# Altium PCB MCORD_AFE_SEC.PCBDOC
Units mil, origin at the board's own origin, x right, y up, seen from the top; angles counter-clockwise.
Board outline 2322.83 x 787.4 mil, 4 copper layers (TOP, G1, PWR, BOT), stack 58.685 mil thick; 42 components, 24 nets, 110 pads, 44 vias.
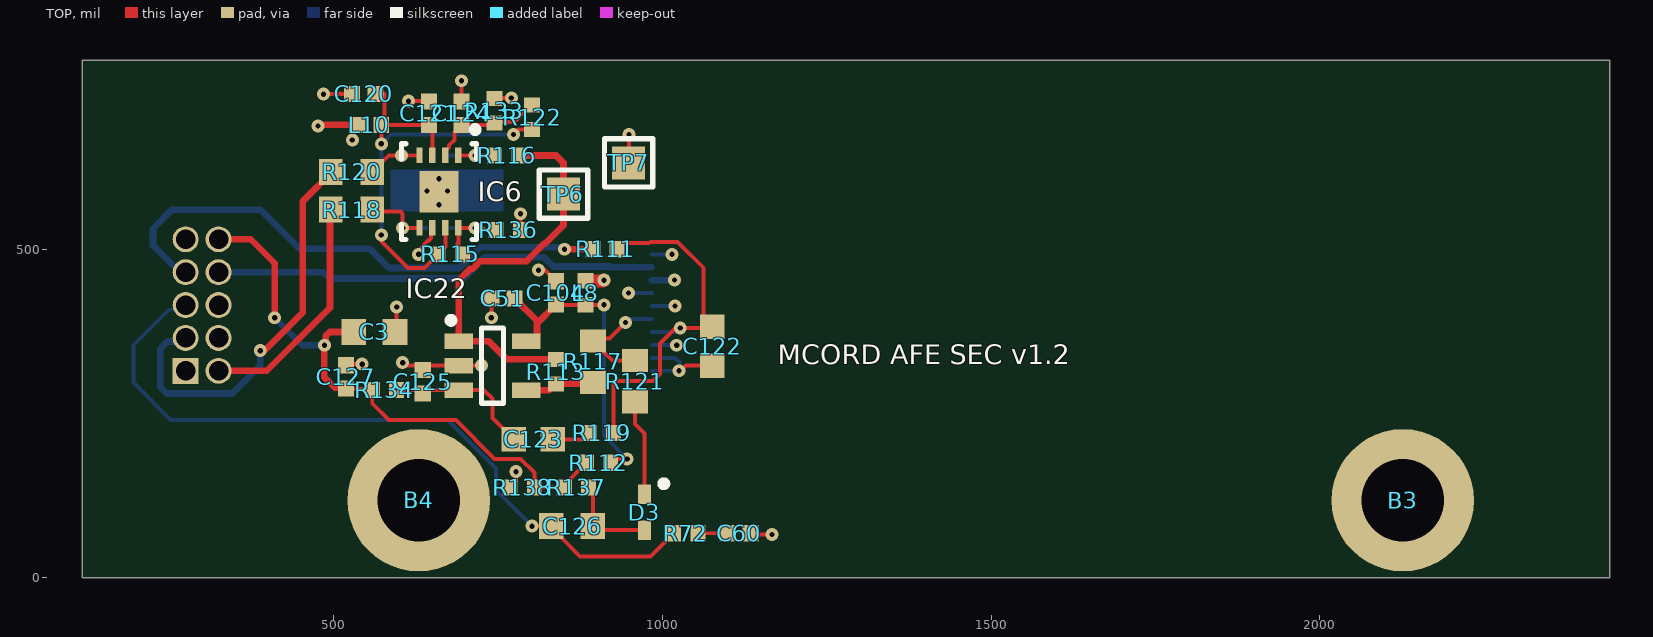
[diagram p0: TOP view]
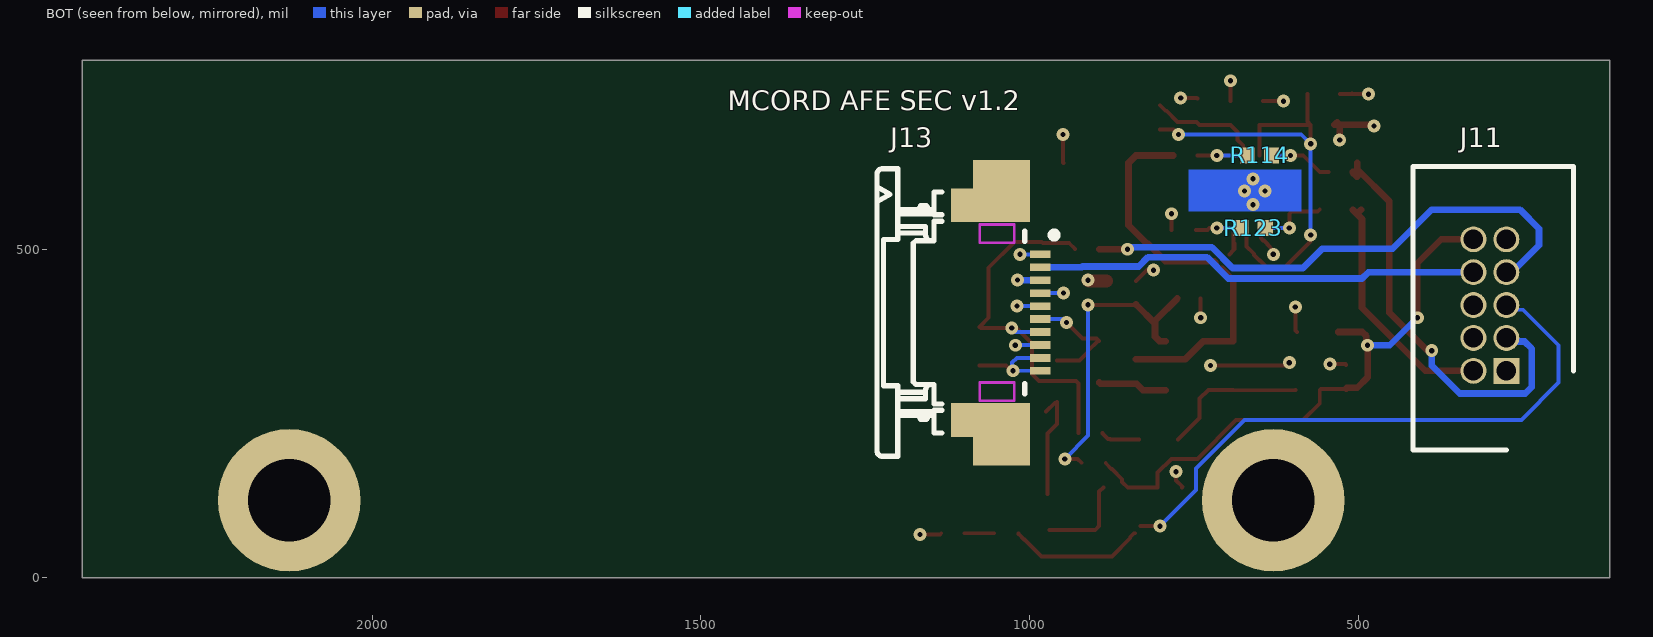
[diagram p1: BOT view, seen from below]
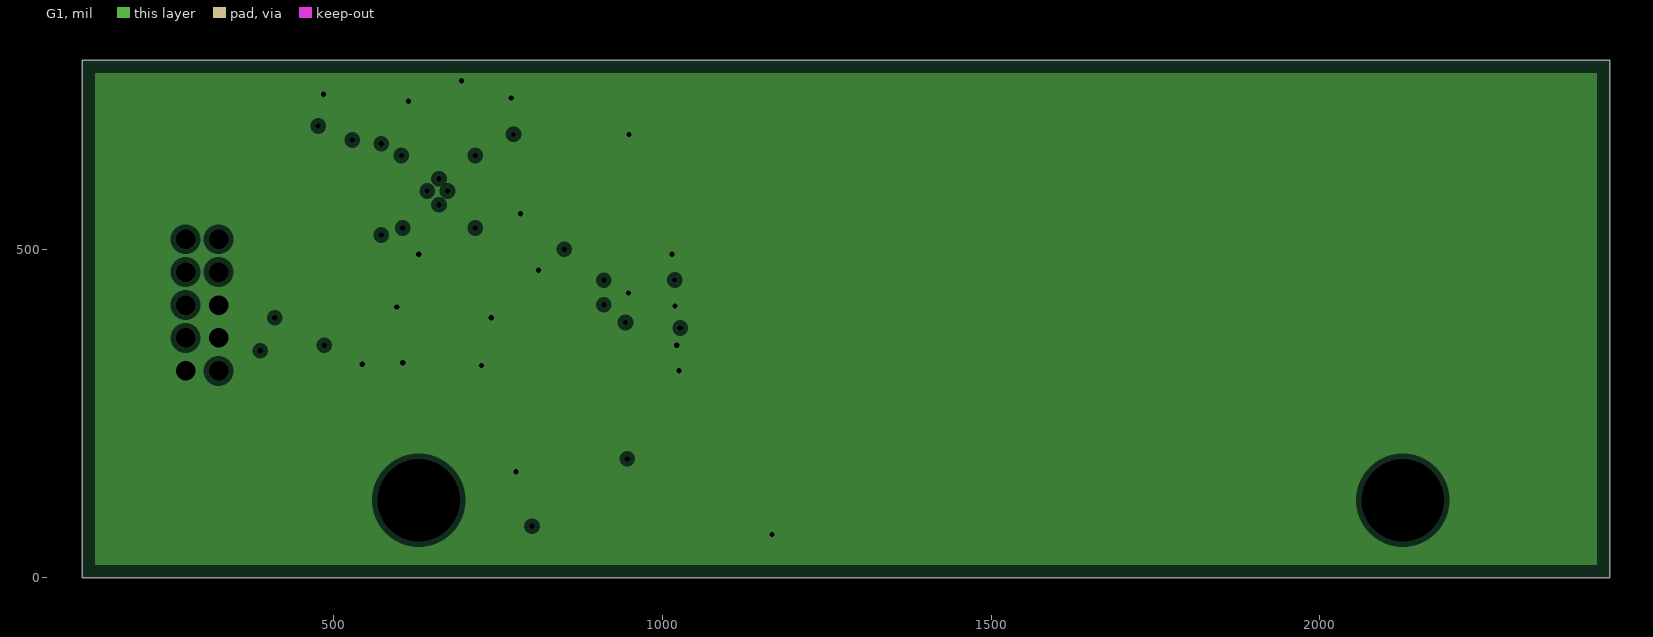
[diagram p2: G1, clearances drawn from the general rule]
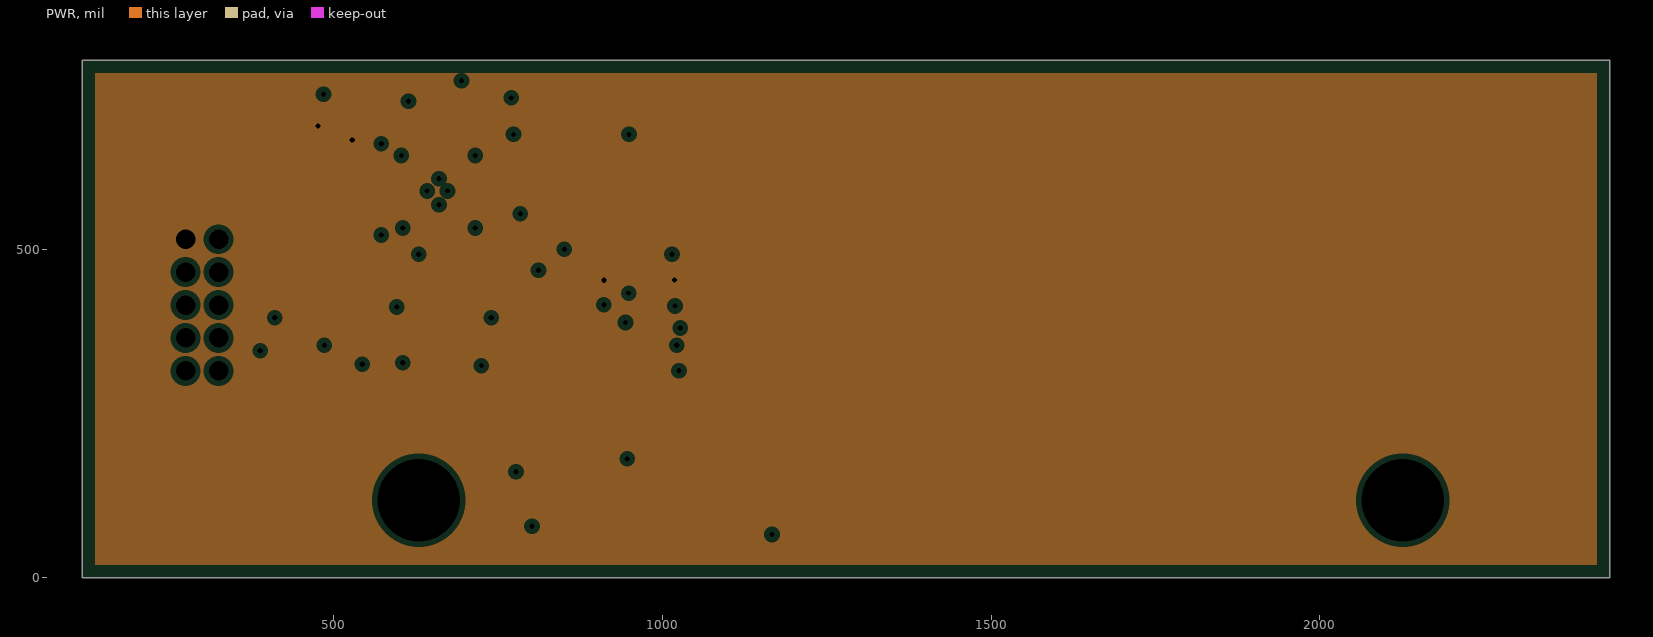
[diagram p3: PWR, clearances drawn from the general rule]
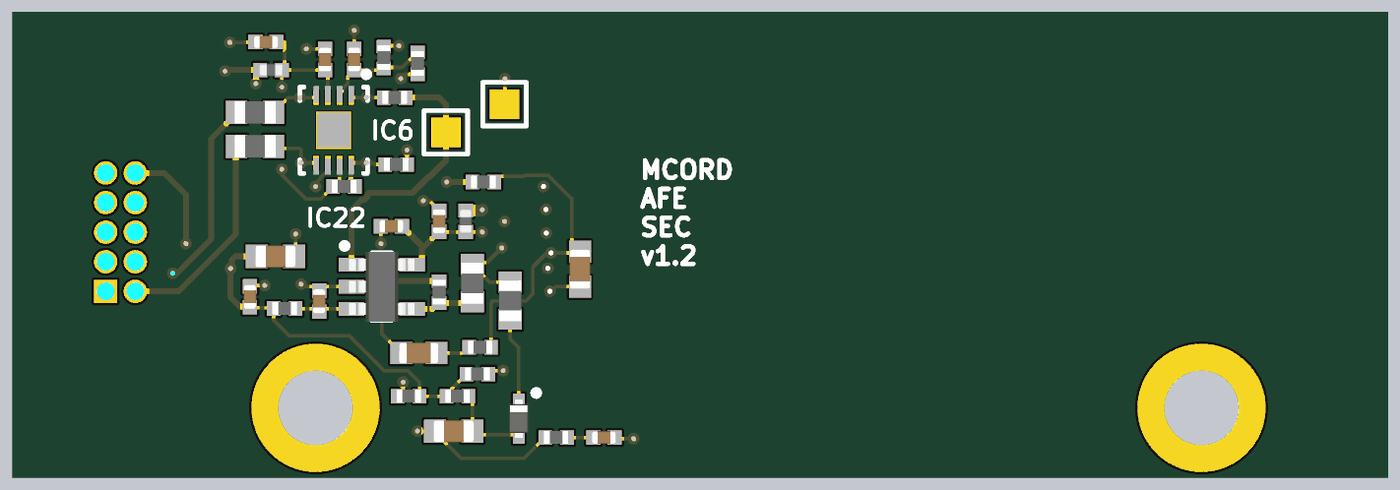
[diagram p4: 3D render of the assembled board from above, using the file's embedded part models]
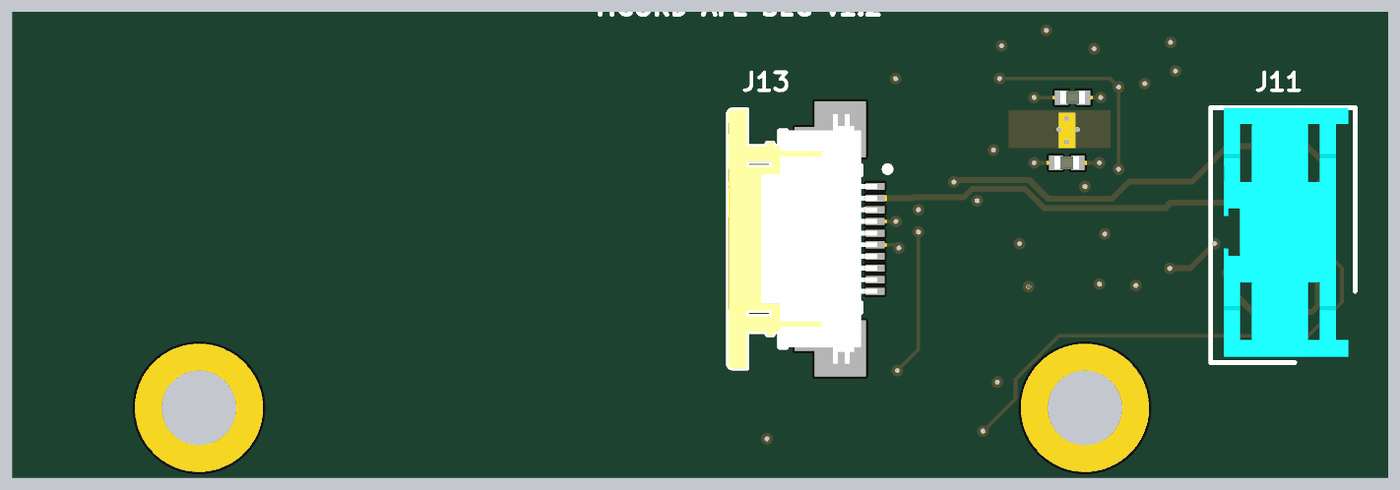
[diagram p5: 3D render of the assembled board from below, using the file's embedded part models]

## Layer stack, top to bottom
TopSolder: solder mask 0.3937, Solder Resist, Dk 3.5
TOP: signal copper 1.3778
Dielectric1: prepreg 7.0866, FR-4, Dk 4.8
G1: plane copper 1.3779, net GND
Dielectric2: core 39, Core-042, Dk 4.6
PWR: plane copper 1.3779, net P5V0
Dielectric3: prepreg 7.0866, FR-4, Dk 4.8
BOT: signal copper 1.3778
BottomSolder: solder mask 0.3937, Solder Resist, Dk 3.5

## Board outline
118.11,0 2440.94,0 2440.94,787.4 118.11,787.4

## Design rules (kind name [scope] priority, off if disabled: settings)
AcuteAngle [All] p1: minimum=6.00000000000000E+0001 checktracksonly=FALSE
Clearance keepout [All vs OnLayer('KeepOutLayer')] p1: gap=3.94 ignorepadtopadclearanceinfootprint=FALSE
Clearance [All] p2: gap=5 ignorepadtopadclearanceinfootprint=FALSE
DiffPairsRouting [All] p1: maxlimit=20 minlimit=15 mostfreqgap=17 toplayer_minwidth=15 toplayer_maxwidth=15 toplayer_prefwidth=15 bottomlayer_minwidth=15 bottomlayer_maxwidth=15 bottomlayer_prefwidth=15 maxuncoupledlength=500
HoleSize [All] p1: absolutevalues=TRUE maxlimit=200 minlimit=1 maxpercent=80.000 minpercent=20.000
HoleToHoleClearance [All] p1: gap=5 allowstackedmicrovias=TRUE
MinimumSolderMaskSliver [All] p1: minsoldermaskwidth=0
MinimumSolderMaskSliver SilkscreenOverComponentPads [All] p2: minsoldermaskwidth=0
PlaneClearance [All] p1: clearance=8
PlaneConnect [All] p1: pad.planeconnectstyle=Relief pad.reliefexpansion=5 pad.reliefentries=4 pad.reliefconductorwidth=5 pad.reliefairgap=5 via.planeconnectstyle=Direct via.reliefexpansion=20 via.reliefentries=4 via.reliefconductorwidth=10 via.reliefairgap=10
PolygonConnect [All] p1: thpad.connectstyle=Relief thpad.reliefconductorwidth=5 thpad.reliefentries=4 thpad.polygonreliefangle="90 Angle" thpad.airgapwidth=5 smdpad.connectstyle=Relief smdpad.reliefconductorwidth=5 smdpad.reliefentries=4 smdpad.polygonreliefangle="90 Angle" smdpad.airgapwidth=5 via.connectstyle=Direct via.reliefconductorwidth=10 via.reliefentries=4 via.polygonreliefangle="90 Angle" via.airgapwidth=10
RoomDefinition MCORD_AFE_SEC [InComponentClass('MCORD_AFE_SEC')] p1 off: confinementstyle=ConfineIn formatcopy=TRUE lockcomponents=FALSE outline 2359.49,787.4 2359.49,188.82 2125.98,188.82 2125.98,787.4
RoutingVias [All] p1: holewidth=7.87 width=19.68 viastyle="Through Hole" minholewidth=7.87 minwidth=19.68 maxholewidth=19.68 maxwidth=39.37
SilkToSilkClearance [All] p1: silktosilkclearance=0
SilkToSolderMaskClearance [IsPad] p1: minsilkscreentomaskgap=0 clearancetoexposedcopper=TRUE
SolderMaskExpansion [All] p1: expansion=4 istentingtop=FALSE
ViasUnderSMD ViasUnderSMD_allow [InComponent('IC18') or InComponent('IC10') or InComponent('IC13') or InComponent('IC14') or InComponent('IC15')] p1: allowed=TRUE
ViasUnderSMD [All] p2: allowed=FALSE
Width Width_1 [(InDifferentialPairClass('All Differential Pairs'))] p1: maxlimit=8 minlimit=8 preferedwidth=8
Width [All] p2: maxlimit=100 minlimit=6 preferedwidth=6
22 further rules are at their usual default settings.

## Components (designator, comment, footprint, x,y, rotation, side; value= is the part's Value field where it differs from the comment)
B3 "Plated Hole" MTG320_550 2125.98,118.11 r0 top locked
B4 "Plated Hole" MTG320_550 629.92,118.11 r0 top locked
C3 "1uF" CAPC1608X87N 562.44,374.04 r180 top
C51 "1nF" CAPC1005X55N 758,425 r0 top
C60 "1nF" CAPC1005X55N 1117,68 r180 top
C104 "100nF" CAPC1005X55N 838.58,433.46 r270 top
C120 "1nF" CAPC1005X55N 546.3,736.07 r0 top
C121 "100nF" CAPC1005X55N 645.87,706.73 r270 top
C122 "100nF" CAPC1608X90N 1076.38,352.36 r90 top
C123 "100nF" CAPC1608X90N 804.13,210.63 r0 top
C124 "100nF" CAPC1005X55N 695.08,706.73 r270 top
C125 "22pF" CAPC1005X55N 636.03,298.23 r270 top
C126 "10pF" CAPC1608X87N 863.19,78.74 r0 top
C127 "100nF" CAPC1005X55N 519.11,305.7 r270 top
D3 "1PS79SB70" SODFL1608X65N 973,100 r270 top
IC6 "LMH6552SD" SDA08C 660.63,587.25 r270 top
IC22 "AD8009JRTZ-REEL7" SOT95P280X145-5N 741.93,322.83 r0 top
J11 "CON_IDC10_1.27_45210-600230" SHDR10W38P127_2X5_1069X594X747P 275.59,314.96 r90 bottom
J13 "FFC/FPC" MOLEX_52745-1097 984.25,403.55 r270 bottom
L8 "120R@100MHz" INDC1005X55N 883.46,433.46 r90 top
L10 "120R@100MHz" INDC1005X55N 554.94,689.02 r180 top
R72 "49R9" RESC1005X40N 1036.04,68 r180 top
R111 "10k" RESC1005X40N 913.19,499.75 r180 top
R112 "Undefined" RESC1005X40N 903.15,175.2 r0 top
R113 "5k1" RESC1005X40N 838.58,313.78 r90 top
R114 "270" RESC1005X40N 650.79,642.37 r180 bottom
R115 "240" RESC1005X40N 677.95,492.13 r180 top
R116 "120" RESC1005X40N 763.58,642.37 r180 top
R117 "22" RESC1608X55N 894.69,328.74 r270 top
R118 "22" RESC1608X55N 527.8,560.04 r180 top
R119 "270" RESC1005X40N 907.87,220.47 r180 top
R120 "22" RESC1608X55N 527.8,617.33 r180 top
R121 "22" RESC1608X55N 958.66,299.21 r90 top
R122 "510" RESC1005X40N 802.17,700.24 r270 top
R123 "270" RESC1005X40N 660.63,532.13 r180 bottom
R133 "510" RESC1005X40N 745.08,710.28 r270 top
R134 "1k" RESC1005X40N 577.8,286.01 r180 top
R136 "240" RESC1005X40N 765.95,529.25 r180 top
R137 "47k" RESC1005X40N 869.69,137.8 r180 top
R138 "Undefined" RESC1005X40N 787.4,137.8 r0 top
TP6 "Test Point" TPS127 850,583.64 r0 top
TP7 "Test Point" TPS127 949.02,631.08 r0 top

## Footprints (in the part's own frame and the unit in brackets; to place one, negate y for a bottom-side part, rotate by r counter-clockwise, add the part's x,y. Pads: shape width x height; smd on the part's side, far side on the other; paste and mask are expansions set on the pad)
CAPC1005X55N [mm] "Capacitor, Non-Polarized, Chip; 1.00mm L X 0.50mm W X 0.70mm H, IPC Medium Density"
  rect 0.62x0.62 smd: 1(-0.45,0) 2(0.45,0)
  body extent -0.52,-0.27 0.53,0.28, height 0.55
CAPC1608X87N [mm] "Chip Capacitor, Body 1.6x0.8mm IPC Medium Density"
  rect 0.95x1 smd: 1(-0.8,0) 2(0.8,0)
  body extent -0.87,-0.47 0.88,0.48, height 0.87
CAPC1608X90N [mm] "Chip Capacitor, Body 1.6x0.8mm IPC Medium Density"
  rect 0.95x0.95 smd: 1(-0.75,0) 2(0.75,0)
  body extent -0.85,-0.45 0.85,0.45, height 0.9
INDC1005X55N [mm] "Chip Inductor, 2-Leads, EIA 0402, Metric 1005, Body 1x0.5mm, 0402IPC Medium Density"
  rect 0.6x0.62 smd: 1(-0.46,0) 2(0.46,0)
  body extent -0.52,-0.27 0.53,0.28, height 0.55
MOLEX_52745-1097 [mm] "10 Contacts, 0.5mm Pitch, Right Angled Surface Mount FPC Connector, ZIF, Top Contact Style"
  rect 0.3x0.8 smd: 1(-2.25,0) 2(-1.75,0) 3(-1.25,0) 4(-0.75,0) 5(-0.24,0) 6(0.25,0) 7(0.75,0) 8(1.25,0) 9(1.75,0) 10(2.25,0)
  rect 1.1x2.2 smd: MECH(-5.35,-1.5) MECH(5.35,-1.5)
  rect 1.3x3.05 smd: MECH(-4.15,-1.925) MECH(4.15,-1.925)
  TOP keep-out lines w0.1: 3.4,-1 3.4,-2.34 2.7,-2.34 2.7,-1 3.4,-1 ; -2.7,-1 -3.4,-1 -3.4,-2.34 -2.7,-2.34 -2.7,-1
  silkscreen extent -5.55,-6.3 5.55,0.66, body extent -5.55,-6.3 5.55,0.1, height 2
MTG320_550 [mm] "Plated Through Hole: Hole Dia.=3.2mm Pad Dia.=5.5mm"
  round 5.5 hole 3.2: 1(0,0)
RESC1005X40N [mm] "Chip Resistor, EIA 0402, Metric 1005, Body 1.0x0.5mm, IPC Medium Density"
  rect 0.58x0.62 smd: 1(-0.47,0) 2(0.47,0)
  body extent -0.52,-0.27 0.53,0.28, height 0.4
RESC1608X55N [mm] "Chip Resistor, EIA 0603, Metric 1608, Body 1.6x0.8mm, IPC Medium Density"
  rect 0.9x1 smd: 1(-0.8,0) 2(0.8,0)
  body extent -0.87,-0.47 0.88,0.48, height 0.55
SDA08C [mm] "SON, 8-Leads, Body 2.5x3mm, Pitch 0.5mm, NSC Recommended"
  rect 0.6x0.25 smd paste-0.125 mask+0.051: 1(-1.4,0.75) 2(-1.4,0.25) 3(-1.4,-0.25) 4(-1.4,-0.75) 5(1.4,-0.75) 6(1.4,-0.25) 7(1.4,0.25) 8(1.4,0.75)
  rect 1.6x1.5 smd paste-0.05 mask+0.051: 9(0,0)
  silkscreen extent -2.52,-1.45 1.85,1.53, body extent -1.55,-1.3 1.55,1.3, height 0.8
SHDR10W38P127_2X5_1069X594X747P [mm]
  rect 1x1 hole 0.75: 1(0,0)
  round 1 hole 0.75: 2(0,1.27) 3(1.27,0) 4(1.27,1.27) 5(2.54,0) 6(2.54,1.27) 7(3.81,0) 8(3.81,1.27) 9(5.08,0) 10(5.08,1.27)
  silkscreen extent -3.06,-2.59 7.88,3.61, body extent -2.79,-2.29 7.87,3.05, height 5.65
SODFL1608X65N [mm] "Ultra Small Outline Diode Flat Lead (SOD-523), Body; 1.2mm L X 0.8mm W X 0.65mm H, IPC Medium Density"
  rect 0.75x0.5 smd: 1(-0.7,0) 2(0.7,0)
  silkscreen extent -1.22,0.63 -0.98,0.88, body extent -0.82,-0.42 0.83,0.43, height 0.65
SOT95P280X145-5N [mm] "SOT, 0.95mm pitch; 5 pin, 1.60mm W X 2.90mm L X 1.45mm H body, IPC Medium Density"
  rect 1.1x0.6 smd: 1(-1.3,0.95) 2(-1.3,0) 3(-1.3,-0.95) 4(1.3,-0.95) 5(1.3,0.95)
  silkscreen extent -1.72,-1.45 0.43,1.87, body extent -1.4,-1.5 1.4,1.5, height 1.45
TPS127 [mil] "1.27 x  1.27mm SMD Test Point Area"
  rect 50x50 smd paste-50: 1(0,0)
  silkscreen extent -37,-37 37,37

## Part data
B3 B4: library part PLATED_HOLE3.2_PAD5.5, "Single Terminal Socket", Author="CERN DEM JMW", ComponentHeight=0mm, Component Type="Standard (No BOM)", CreateDate=01.10.2012, Family="Plated Hole", HelpURL=Undefined, LatestRevisionDate=01.10.2012, Mounted=No, PackageDescription="Plated Through Hole: Hole Dia.=3.2mm Pad Dia.=5.5mm", Part Description="Plated Through Hole: Hole Dia.=3.2mm Pad Dia.=5.5mm", Part Number=PLATED_HOLE3.2_PAD5.5, Pin Count=1, Sense=No, SMD=No, Socket=No, Status=None
C3: library part CC0603_1UF_16V_10%_X7R, "Non-polarised capacitor", Case=0603, Manufacturer=GENERIC, Manufacturer1 ComponentHeight=0.9mm, Manufacturer1 Example="YAGEO PHYCOMP", Manufacturer1 Part Number=223878615663, Manufacturer Part Number=CC0603_1uF_16V_10%_X7R, Tolerance=±10%, Voltage=16V, Author="CERN DEM JLC", Component Type=Standard, CreateDate=03.12.2007, HelpURL=\\cern.ch\dfs\Applications\Altium\Datasheets\CC0603_X7R_PHYCOMP.pdf, LatestRevisionDate=17.04.2015, Mounted=Yes, Part Description="SMD Multilayer Chip Ceramic Capacitor", Part Number=CC0603_1UF_16V_10%_X7R, Pin Count=2, Sense=No, SMD=Yes, Socket=No, Status=None, TC=X7R
C51 C60 C120: library part CC0402_1NF_50V_5%_C0G, "Non-polarised capacitor", Case=0402, Manufacturer=GENERIC, Manufacturer1 ComponentHeight=0.55mm, Manufacturer1 Example=KEMET, Manufacturer1 Part Number=C0402C102J5GACTU, Tolerance=±5%, Voltage=50V, Author="CERN DEM BC", Component Type=Standard, CreateDate=02/09/2019, HelpURL="\\cern.ch\dfs\Applications\Altium\Datasheets\CC0402_C0G_KEMET_(Commercial Grade).pdf", LatestRevisionDate=02/09/2019, Manufacturer Part Number=CC0402_1NF_50V_5%_C0G, Mounted=Yes, Part Description="SMD Multilayer Chip Ceramic Capacitor", Part Number=CC0402_1NF_50V_5%_C0G, Pin Count=2, Sense=No, SMD=Yes, Socket=No, Status=Preferred, TC=C0G/NP0
C104 C121 C124 C127: library part CC0402_100NF_16V_10%_X7R, "Non-polarised capacitor", Case=0402, Manufacturer=GENERIC, Manufacturer1 ComponentHeight=0.55mm, Manufacturer1 Example=MURATA, Manufacturer1 Part Number=GRM155R71C104KA88D, Tolerance=±10%, Voltage=16V, Author="CERN DEM JLC", Component Type=Standard, CreateDate=05.12.2013, HelpURL=\\cern.ch\dfs\Applications\Altium\Datasheets\CC0402_X7R_MURATA_GRM.pdf, LatestRevisionDate=03.12.2007, Manufacturer Part Number=CC0402_100NF_16V_10%_X7R, Mounted=Yes, Part Description="SMD Multilayer Chip Ceramic Capacitor", Part Number=CC0402_100NF_16V_10%_X7R, Pin Count=2, Sense=No, SMD=Yes, Socket=No, Status="Not Recommended", TC=X7R
C122 C123: library part CC0603_100NF_100V_10%_X7R, "Non-polarised capacitor", Case=0603, Manufacturer=GENERIC, Manufacturer1 ComponentHeight=0.9mm, Manufacturer1 Example=MURATA, Manufacturer1 Part Number=GRM188R72A104KA35D, Tolerance=±10%, Voltage=100V, Author="CERN DEM JLC", Component Type=Standard, CreateDate=11.12.2013, HelpURL=\\cern.ch\dfs\Applications\Altium\Datasheets\CC0603_MURATA_GRM188R72A104KA35D.pdf, LatestRevisionDate=11.12.2013, Manufacturer Part Number=CC0603_100NF_100V_10%_X7R, Mounted=Yes, Part Description="SMD Multilayer Chip Ceramic Capacitor", Part Number=CC0603_100NF_100V_10%_X7R, Pin Count=2, Sense=No, SMD=Yes, Socket=No, Status=None, TC=X7R
C125: library part CC0402_22PF_50V_5%_C0G, "Non-polarised capacitor", Case=0402, Manufacturer=GENERIC, Manufacturer1 ComponentHeight=0.55mm, Manufacturer1 Example=KEMET, Manufacturer1 Part Number=C0402C220J5GACTU, Tolerance=±5%, Voltage=50V, Author="CERN DEM JLC", Component Type=Standard, CreateDate=03.12.2007, HelpURL="\\cern.ch\dfs\Applications\Altium\Datasheets\CC0805_C0G_KEMET_(Commercial Grade).pdf", LatestRevisionDate=03.12.2007, Manufacturer Part Number=CC0402_22PF_50V_5%_C0G, Mounted=Yes, Part Description="SMD Multilayer Chip Ceramic Capacitor", Part Number=CC0402_22PF_50V_5%_C0G, Pin Count=2, Sense=No, SMD=Yes, Socket=No, Status=Preferred, TC=C0G/NP0
C126: library part CC0603_10PF_50V_5%_NP0, "Non-polarised capacitor", Case=0603, Manufacturer=GENERIC, Manufacturer1 ComponentHeight=0.87mm, Manufacturer1 Example=PHYCOMP, Manufacturer1 Part Number=223886715109, Tolerance=±5%, Voltage=50V, Author="CERN DEM JLC", Component Type=Standard, CreateDate=03.12.2007, HelpURL=\\cern.ch\dfs\Applications\Altium\Datasheets\CC0603_NP0_PHYCOMP.pdf, LatestRevisionDate=03.12.2007, Manufacturer Part Number=CC0603_10PF_50V_5%_NP0, Mounted=Yes, Part Description="SMD Multilayer Chip Ceramic Capacitor", Part Number=CC0603_10PF_50V_5%_NP0, Pin Count=2, Sense=No, SMD=Yes, Socket=No, Status=Preferred, TC=C0G/NP0
D3: "Diode", Case=SOD523, Manufacturer=NEXPERIA, Power=70mA, Voltage=70V, Author=GK, Bonding=No, Component Type=Standard, ComponentHeight=0.65mm, CreateDate=11/09/2018, Device=1PS79SB70, HelpURL=\\cern.ch\dfs\Applications\Altium\Datasheets\BAS516.pdf, LatestRevisionDate=11/09/2018, Manufacturer Part Number=1PS79SB70, Mounted=Yes, PackageDescription="Ultra Small Outline Diode Flat Lead (SOD-523), Body; 1.2mm L X 0.8mm W X 0.65mm H, IPC Medium Density", Part Description="High-speed switching diode", Part Number=1PS79SB70, Pin Count=2, PressFit=No, Sense=No, SMD=Yes, Socket=No
IC6: library part CMP-0055-00984-1, "1.5 GHz Fully Differential Amplifier, 8-pin LLP", Manufacturer="National Semiconductor", PackageTopMarking=XYTT*6552, PowerWise=Y, CompType=Amplifiers, DatasheetVersion=Sep-2007, PackageDescription="LLP, Plastic, Dual, 2.5 x 3.0 x 0.8mm Body, 8 Lead, 0.5mm Pitch, No Pullback", PackageReference=SDA08C, PackageVersion="revA, Jan-2004", PinCount=8, RoHS=Y
IC22: "Operational Amplifier", Case=SOT23-5, Manufacturer="ANALOG DEVICES", Author="CERN DEM JLC", Bonding=No, Component Type=Standard, ComponentHeight=1.45mm, CreateDate=23/09/2010, Device=AD8009JRTZ-REEL7, HelpURL=\\cern.ch\dfs\Applications\Altium\Datasheets\AD8009JRTZ-REEL7.pdf, LatestRevisionDate=23/09/2010, Manufacturer Part Number=AD8009JRTZ-REEL7, Mounted=Yes, PackageDescription="SOT, 0.95mm pitch; 5 pin, 1.60mm W X 2.90mm L X 1.45mm H body, IPC Medium Density", Part Description="1GHz, 5,500 V/us Low Distortion Amplifier", Part Number=AD8009JRTZ-REEL7, Pin Count=5, PressFit=No, Sense=No, SMD=Yes, Socket=No
J11: "Connector", Manufacturer_Name=3M, Manufacturer_Part_Number=45210-600230, Mouser Part Number=517-45210-600230, RS Part Number=8273691, Allied_Number=70331440, Allied Price/Stock=https://www.alliedelec.com/3m-45210-600230/70331440/, Datasheet Link=http://multimedia.3m.com/mws/media/905148O/3m-shrouded-boardmount-header-452-series-cd2437.pdf, Height=7.468mm, Mouser Price/Stock=https://www.mouser.com/Search/Refine.aspx?Keyword=517-45210-600230, RS Price/Stock=https://uk.rs-online.com/web/p/products/8273691
J13: library part MOLEX_52745-1097, "Connector 10 Female", Manufacturer=MOLEX, Manufacturer Part Number=52745-1097, Author="CERN DEM JLC", ComponentHeight=2mm, Component Type=Standard, CreateDate=04.11.2014, Family=FFC/FPC, HelpURL=\\cern.ch\dfs\Applications\Altium\Datasheets\MOLEX_52745-1097.pdf, LatestRevisionDate=05.12.2014, Mounted=Yes, Part Description="10 Contacts, 0.5mm Pitch, Right Angled Surface Mount FFC/FPC Connector, ZIF, Top Contact Style", Part Number=MOLEX_52745-1097, Pin Count=10, PressFit=No, Sense=No, SMD=Yes, Socket=No, Status=None
L8 L10: library part IND0402_MURATA_BLM15PX121SN1D, Case=0402, Manufacturer=MURATA, Manufacturer Part Number=BLM15PX121SN1D, Power=2A, Resistance=0.055R, Tolerance=±25%, Author="CERN DEM JMW", ComponentHeight=0.55mm, Component Type=Standard, CreateDate=19.02.2014, HelpURL=\\cern.ch\dfs\Applications\Altium\Datasheets\IND0402_MURATA_BLM15PX.pdf, LatestRevisionDate=25.10.2018, Mounted=Yes, Part Description="SMD EMIFIL Chip Ferrite Bead", Part Number=IND0402_MURATA_BLM15PX121SN1D, Pin Count=2, Sense=No, SMD=Yes, Socket=No, Status=None
R72: library part R0402_49R9_1%_0.0625W_100PPM, "Resistor - 1%", Case=0402, Manufacturer=GENERIC, Manufacturer1 ComponentHeight=0.4mm, Manufacturer1 Example="YAGEO PHYCOMP", Manufacturer1 Part Number="232270674999L or RC0402FR-0749R9L", Power=0.0625W, Tolerance=±1%, Author="CERN DEM JLC", Component Type=Standard, CreateDate=2012-10-24, HelpURL=\\cern.ch\dfs\Applications\Altium\Datasheets\R0402_Phycomp_RC0402.pdf, LatestRevisionDate=2012-10-24, Manufacturer Part Number=R0402_49R9_1%_0.0625W_100PPM, Mounted=Yes, Part Description="General Purpose Thick Film Chip Resistor", Part Number=R0402_49R9_1%_0.0625W_100PPM, Pin Count=2, SMD=Yes, Socket=No, Status="Not recommended", Table="Resistors SMD", TC=±100ppm/°C
R111: library part R0402_10K_1%_0.0625W_100PPM, "Resistor - 1%", Case=0402, Manufacturer=GENERIC, Manufacturer1 ComponentHeight=0.4mm, Manufacturer1 Example="YAGEO PHYCOMP", Manufacturer1 Part Number=232270671003L, Power=0.0625W, Tolerance=±1%, Author="CERN DEM JLC", Component Type=Standard, CreateDate=03.12.2007, HelpURL=\\cern.ch\dfs\Applications\Altium\Datasheets\R0402_Phycomp_RC0402.pdf, LatestRevisionDate=17.10.2012, Manufacturer Part Number=R0402_10K_1%_0.0625W_100PPM, Mounted=Yes, Part Description="General Purpose Thick Film Chip Resistor", Part Number=R0402_10K_1%_0.0625W_100PPM, Pin Count=2, PressFit=No, Sense=No, SMD=Yes, Socket=No, Status="Not Recommended", TC=±100ppm/°C
R112 R138: library part R0402_NO-VALUE, "Resistor", Case=0402, Author="CERN DEM JLC", Component Type=Standard, CreateDate=03/12/2007, HelpURL=Undefined, LatestRevisionDate=13/03/2008, Manufacturer=Undefined, Manufacturer1 ComponentHeight=Undefined, Manufacturer1 Example=Undefined, Manufacturer1 Part Number=Undefined, Manufacturer Part Number=R0402_NO-VALUE, Mounted=No, Part Description="Reserved Footprint For a 0402 (1005) Chip Resistor", Part Number=R0402_NO-VALUE, Pin Count=2, PressFit=No, Sense=No, SMD=Yes, Socket=No, Status=None
R113: library part R0402_5K1_1%_0.0625W_100PPM, "Resistor - 1%", Case=0402, Manufacturer=GENERIC, Manufacturer1 ComponentHeight=0.4mm, Manufacturer1 Example="YAGEO PHYCOMP", Manufacturer1 Part Number=232270675102L, Power=0.0625W, Tolerance=±1%, Author="CERN DEM JLC", Component Type=Standard, CreateDate=03.12.2007, HelpURL=\\cern.ch\dfs\Applications\Altium\Datasheets\R0402_Phycomp_RC0402.pdf, LatestRevisionDate=17.10.2012, Manufacturer Part Number=R0402_5K1_1%_0.0625W_100PPM, Mounted=Yes, Part Description="General Purpose Thick Film Chip Resistor", Part Number=R0402_5K1_1%_0.0625W_100PPM, Pin Count=2, PressFit=No, Sense=No, SMD=Yes, Socket=No, Status="Not Recommended", TC=±100ppm/°C
R114 R119 R123: library part R0402_270R_1%_0.0625W_100PPM, "Resistor - 1%", Case=0402, Manufacturer=GENERIC, Manufacturer1 ComponentHeight=0.4mm, Manufacturer1 Example="YAGEO PHYCOMP", Manufacturer1 Part Number=232270672701L, Power=0.0625W, Tolerance=±1%, Author="CERN DEM JLC", Component Type=Standard, CreateDate=03.12.2007, HelpURL=\\cern.ch\dfs\Applications\Altium\Datasheets\R0402_Phycomp_RC0402.pdf, LatestRevisionDate=17.10.2012, Manufacturer Part Number=R0402_270R_1%_0.0625W_100PPM, Mounted=Yes, Part Description="General Purpose Thick Film Chip Resistor", Part Number=R0402_270R_1%_0.0625W_100PPM, Pin Count=2, PressFit=No, Sense=No, SMD=Yes, Socket=No, Status="Not Recommended", TC=±100ppm/°C
R115 R136: library part R0402_240R_1%_0.0625W_100PPM, "Resistor - 1%", Case=0402, Manufacturer=GENERIC, Manufacturer1 ComponentHeight=0.4mm, Manufacturer1 Example="YAGEO PHYCOMP", Manufacturer1 Part Number=232270672401L, Power=0.0625W, Tolerance=±1%, Author="CERN DEM JLC", Component Type=Standard, CreateDate=03.12.2007, HelpURL=\\cern.ch\dfs\Applications\Altium\Datasheets\R0402_Phycomp_RC0402.pdf, LatestRevisionDate=17.10.2012, Manufacturer Part Number=R0402_240R_1%_0.0625W_100PPM, Mounted=Yes, Part Description="General Purpose Thick Film Chip Resistor", Part Number=R0402_240R_1%_0.0625W_100PPM, Pin Count=2, PressFit=No, Sense=No, SMD=Yes, Socket=No, Status="Not Recommended", TC=±100ppm/°C
R116: library part R0402_120R_1%_0.0625W_100PPM, "Resistor - 1%", Case=0402, Manufacturer=GENERIC, Manufacturer1 ComponentHeight=0.4mm, Manufacturer1 Example="YAGEO PHYCOMP", Manufacturer1 Part Number=232270671201L, Power=0.0625W, Tolerance=±1%, Author="CERN DEM JLC", Component Type=Standard, CreateDate=03.12.2007, HelpURL=\\cern.ch\dfs\Applications\Altium\Datasheets\R0402_Phycomp_RC0402.pdf, LatestRevisionDate=17.10.2012, Manufacturer Part Number=R0402_120R_1%_0.0625W_100PPM, Mounted=Yes, Part Description="General Purpose Thick Film Chip Resistor", Part Number=R0402_120R_1%_0.0625W_100PPM, Pin Count=2, PressFit=No, Sense=No, SMD=Yes, Socket=No, Status="Not Recommended", TC=±100ppm/°C
R117 R118 R120 R121: library part R0603_22R_1%_0.1W_100PPM, "Resistor - 1%", Case=0603, Manufacturer=GENERIC, Manufacturer1 ComponentHeight=0.55mm, Manufacturer1 Example="NIC COMPONENT", Manufacturer1 Part Number=NRC06F22R0TRF, Power=0.1W, Tolerance=±1%, Author="CERN DEM JLC", Component Type=Standard, CreateDate=03.12.2007, HelpURL=\\cern.ch\dfs\Applications\Altium\Datasheets\R0603_NIC_NRC.pdf, LatestRevisionDate=13.03.2008, Manufacturer Part Number=R0603_22R_1%_0.1W_100PPM, Mounted=Yes, Part Description="General Purpose Thick Film Chip Resistor", Part Number=R0603_22R_1%_0.1W_100PPM, Pin Count=2, PressFit=No, Sense=No, SMD=Yes, Socket=No, Status=Preferred, TC=±100ppm/°C
R122 R133: library part R0402_510R_1%_0.0625W_100PPM, "Resistor - 1%", Case=0402, Manufacturer=GENERIC, Manufacturer1 ComponentHeight=0.4mm, Manufacturer1 Example="YAGEO PHYCOMP", Manufacturer1 Part Number=232270675101L, Power=0.0625W, Tolerance=±1%, Author="CERN DEM JLC", Component Type=Standard, CreateDate=03.12.2007, HelpURL=\\cern.ch\dfs\Applications\Altium\Datasheets\R0402_Phycomp_RC0402.pdf, LatestRevisionDate=17.10.2012, Manufacturer Part Number=R0402_510R_1%_0.0625W_100PPM, Mounted=Yes, Part Description="General Purpose Thick Film Chip Resistor", Part Number=R0402_510R_1%_0.0625W_100PPM, Pin Count=2, PressFit=No, Sense=No, SMD=Yes, Socket=No, Status="Not Recommended", TC=±100ppm/°C
R134: library part R0402_1K_1%_0.0625W_100PPM, "Resistor - 1%", Case=0402, Manufacturer=GENERIC, Manufacturer1 ComponentHeight=0.4mm, Manufacturer1 Example="YAGEO PHYCOMP", Manufacturer1 Part Number=232270671002L, Power=0.0625W, Tolerance=±1%, Author="CERN DEM JLC", Component Type=Standard, CreateDate=03/12/2007, HelpURL=\\cern.ch\dfs\Applications\Altium\Datasheets\R0402_Phycomp_RC0402.pdf, LatestRevisionDate=17/10/2012, Manufacturer Part Number=R0402_1K_1%_0.0625W_100PPM, Mounted=Yes, Part Description="General Purpose Thick Film Chip Resistor", Part Number=R0402_1K_1%_0.0625W_100PPM, Pin Count=2, PressFit=No, Sense=No, SMD=Yes, Socket=No, Status="Not Recommended", TC=±100ppm/°C
R137: library part R0402_47K_1%_0.0625W_100PPM, "Resistor - 1%", Case=0402, Manufacturer=GENERIC, Manufacturer1 ComponentHeight=0.4mm, Manufacturer1 Example="YAGEO PHYCOMP", Manufacturer1 Part Number=232270675103L, Power=0.0625W, Tolerance=±1%, Author="CERN DEM JLC", Component Type=Standard, CreateDate=03.12.2007, HelpURL=\\cern.ch\dfs\Applications\Altium\Datasheets\R0402_Phycomp_RC0402.pdf, LatestRevisionDate=17.10.2012, Manufacturer Part Number=R0402_47K_1%_0.0625W_100PPM, Mounted=Yes, Part Description="General Purpose Thick Film Chip Resistor", Part Number=R0402_47K_1%_0.0625W_100PPM, Pin Count=2, PressFit=No, Sense=No, SMD=Yes, Socket=No, Status="Not Recommended", TC=±100ppm/°C
TP6 TP7: library part SMD_PAD_1.27X1.27MM, Author="CERN DEM JLC", Component Type="Standard (No BOM)", ComponentHeight=0mm, CreateDate=12.01.2008, Family="Test Point", HelpURL=Undefined, LatestRevisionDate=12.01.2008, Mounted=No, PackageDescription="1.27mm x 1.27mm PCB Copper Area (SMD Test Point)", Part Description="1.27mm x 1.27mm PCB Copper Area (SMD Test Point)", Part Number=SMD_PAD_1.27X1.27MM, Pin Count=1, Sense=No, SMD=Yes, Socket=No, Status=None

## Via types
v1: diameter 19.68, hole 7.87, TOP to BOT, tented both sides, 44 vias

## Nets (pads, with @x,y where several pads share a name; then routed paths per layer and width w, separated by ;. In a path a pad name is that pad's centre, name@x,y a point inside that pad or via, vN(x,y) a via of type N, cw(c..) or ccw(c..) an arc to the next point about the centre after c; other vN are vias at no path point)
AFE_OFFSET: C3.2 C127.2 J11.10 R112.1 R134.2 R137.2 R138.2 | length 895.6
  TOP w6: C127.2@519.11,287.59 557.72,287.59 R134.2 559.29,265.58 584.72,240.16 686.27,240.16 745.32,181.1 784.99,181.1 805.91,160.19 R138.2 R137.2 859.6,146.21 859.6,150.15 875.44,165.99 876.23,165.99 884.65,174.41 R112.1
  TOP w10: J11.10 374.54,514.96 411,478.5 v1(411,395.62) ; C127.2 517.95,289.14 502.22,289.14 486.48,304.88 v1(486.48,353.84) 488.34,355.69 488.34,367.76 494.62,374.04 C3.2
  BOT w10: v1(411,395.62) 452.78,353.84 v1(486.48,353.84)
CAL_IN: C126.1 J11.5 R72.2 | length 1115
  TOP w6: v1(802.17,78.74) C126.1 ; C126.1@840,68 841.45,68 847.39,62.06 847.39,60.61 875,33 982.54,33 1008.33,58.8 1009.12,58.8 1017.54,67.21 R72.2
  BOT w6: J11.5 268.45,407.82 249.99,407.82 196,353.84 196,297 252.84,240.16 673.72,240.16 747.19,166.68 747.19,133.72 v1(802.17,78.74)
DET_OUT1_N: J11.2 R118.2 | length 373.3
  TOP w10: J11.2 398.96,314.96 495,411 495,545.75 R118.2@502.8,553.54 ; R118.2 R118.2@502.8,553.54 ; R118.2@509.29,560.04 R118.2@502.8,553.54
DET_OUT1_P: J11.3 R120.2 | length 646.9
  TOP w10: v1(388.96,345.52) 395.59,345.52 453.43,403.36 453.43,572.49 502.23,621.29 R120.2@502.23,631.08 ; R120.2@502.09,610.12 502.87,610.12 509.29,616.54 R120.2@509.29,617.33
  BOT w10: J11.3 270.14,359.51 247.81,359.51 237,348.7 237,290.31 246.8,280.51 346.51,280.51 388.96,322.96 v1(388.96,345.52)
GND: C3.1 C51.1 C60.1 C104.1 C120.1 C121.1 C122.1 C124.1 C125.1 C127.1 IC6.6 IC22.2 J11.1 J11.4 J11.6 J13.1 J13.4 J13.5 J13.8 J13.9 J13.10 R133.1 R136.1 R138.1 TP7.1 | length 853.4
  TOP w6: v1(485.28,735.52) 509.5,735.52 510.26,736.28 510.47,736.07 C120.1 ; C127.1@519.11,323.81 520.3,325 v1(544,325) ; C3.1 596.39,376.49 v1(596.39,412.04) ; v1(605.51,327.29) 609.97,322.83 IC22.2 v1(725.2,322.83) ; v1(614.41,724.84) C121.1@645.87,724.84 ; v1(629.92,492.13) 629.92,497.9 639.03,507.01 639.03,508.06 644.3,513.33 645.35,513.33 648.87,516.85 648.87,530.21 IC6.6 ; C124.1@695.08,724.84 v1(695.08,756) ; v1(740.28,395.62) C51.1 ; R133.1 746.26,729.96 v1(770.67,729.96) ; R138.1 768,138.69 777.84,148.54 v1(777.84,161.6) ; R136.1 v1(784.45,553.74) ; v1(812,468) 822.16,468 C104.1@838.58,451.57 ; TP7.1 949.61,631.67 v1(949.61,674.45) ; v1(1025.69,315.05) 1028.26,315.05 1036.04,322.83 C122.1 ; C60.1 1136.72,66 v1(1167,66)
  BOT w6: v1(949.02,433.07) J13.4 ; J13.10 984.35,315.05 v1(1025.69,315.05) 1027.04,316.41 1027.04,327.29 1019.69,334.65 J13.9 ; J13.8 984.5,354.08 1021.9,354.08 v1(1022.15,353.84) ; J13.5 984.65,413.39 v1(1019.69,413.39) ; J13.1 v1(1014.88,492.13)
NetC51_2: C51.2 C104.2 IC22.5 L8.1 R112.2 | length 482.1
  TOP w6: C104.2@838.19,415.35 L8.1 v1(911.37,415.35) ; R112.2 927.56,181.1 v1(946.85,181.1)
  TOP w10: C51.2 809.76,390.95 809.76,386.93 ; IC22.5 802.95,360.24 809.76,367.05 809.76,386.93 ; C104.2 838.19,415.35 809.76,386.93
  BOT w6: v1(911.37,415.35) 911.37,216.58 v1(946.85,181.1)
NetC60_2: C60.2 R72.1 | length 44.7
  TOP w6: R72.1 C60.2
NetC120_2: C120.2 C121.2 IC6.3 IC6.7 L10.1 R115.2 R122.2 | length 745.5
  TOP w6: v1(573.05,521.42) 573.05,511.86 613.62,471.28 638.61,471.28 650.24,482.92 651.03,482.92 659.45,491.34 R115.2 659.45,492.91 670.47,503.94 IC6.7 ; v1(573.05,660.08) L10.1 ; 577.8,736.07 577.8,693.77 L10.1 ; IC6.3 650.79,689.02 C121.2 L10.1 ; v1(774.02,674.45) 781.3,681.74 R122.2
  BOT w6: v1(573.05,521.42) v1(573.05,660.08) 587.42,674.45 v1(774.02,674.45)
NetC123_1: C123.1 C125.2 IC22.3 R134.1 | length 227.2
  TOP w6: R134.1 596.88,285.43 IC22.3 691.33,286.01 728.55,286.01 741.93,272.64 741.93,243.31 C123.1
NetC123_2: C123.2 R119.2 | length 60.2
  TOP w6: C123.2 877.44,210.63 878.08,211.27 880.95,211.27 889.37,219.68 R119.2
NetC124_2: C124.2 IC6.2 R122.1 R133.2 | length 176.2
  TOP w6: IC6.2 670.47,649.26 672.39,651.18 672.72,651.18 676.24,654.69 676.24,657.9 684.34,666.01 684.34,677.88 695.08,688.62 741.93,688.62 R133.2 746.6,693.29 775.54,693.29 792.57,710.33 793.75,710.33 R122.1
NetC126_2: C126.2 D3.2 R137.1 | length 140
  TOP w6: R137.1 894.69,131.3 C126.2 900.59,72.83 D3.2@970.47,72.83
NetD3_1: D3.1 R121.1 | length 164.7
  TOP w6: R121.1 958.66,234.02 973,219.68 D3.1 ; R121.1@962.17,266.17 R121.1@975.35,253
NetIC6_1: IC6.1 R114.1 R116.2 | length 101.4
  TOP w6: IC6.1 v1(715.75,642.37) R116.2
  BOT w6: R114.1 v1(715.75,642.37)
NetIC6_4: IC6.4 R114.2 R120.1 | length 123.9
  TOP w6: R120.1@546.3,617.33 R120.1 584.33,642.37 v1(603.54,642.37) IC6.4
  BOT w6: v1(603.54,642.37) R114.2
NetIC6_5: IC6.5 R118.1 R123.2 | length 132.6
  TOP w6: R118.1 562.44,556.89 602.36,556.89 605.51,553.74 v1(605.51,532.13) IC6.5
  BOT w6: v1(605.51,532.13) R123.2
NetIC6_8: IC6.8 R115.1 R123.1 R136.2 | length 150.6
  TOP w6: R115.1 R115.1@690.16,498.43 ; R136.2 730.12,529.25 727.24,532.13 v1(715.75,532.13) IC6.8 690.16,510.18 ; R115.1@690.16,498.43 690.16,510.18 ; R115.1@690.16,498.43 688.83,499.75 688.83,508.85 690.16,510.18
  BOT w6: R123.1 v1(715.75,532.13)
NetIC22_1: IC22.1 R113.2 R116.1 TP6.1 | length 615.6
  TOP w10: R116.1 838.72,642.37 850,631.08 TP6.1 850,536.21 821.85,508.06 820.17,508.06 793.75,481.64 719.64,481.64 717.87,479.87 717.87,475.78 712.02,469.92 707.92,469.92 690.75,452.75 IC22.1 736.02,360.24 763.98,332.28 R113.2
NetIC22_4: IC22.4 R113.1 R117.2 | length 106.5
  TOP w10: IC22.4 827.95,285.43 837.8,295.28 R113.1 892.72,295.28 R117.2
P5V0: J11.9 J13.3 L8.2 L10.2 | length 158
  TOP w10: v1(477,687.05) 479.62,687.05 481.59,689.02 L10.2@529,689.02 ; v1(529,666) L10.2@529,689.02 ; L10.2@529,689.06 532.89,692.95 L10.2 L10.2@529,689.02
  TOP w20: L8.2 910.19,451.57 v1(911.37,452.76)
  BOT w10: J13.3 1018.57,452.76 v1(1018.96,453.15)
SIPM_E_A: J13.6 R117.1 R121.2 | length 180.8
  TOP w6: v1(944.29,388.39) 919.86,363.95 898.4,363.95 R117.1 896.65,360.24 911.37,345.52 911.37,343.55 924.21,330.71 R121.2
  BOT w6: v1(944.29,388.39) 949.61,393.7 J13.6
SIPM_E_C: C122.2 J13.7 R111.1 R119.1 | length 581.7
  TOP w6: R119.1 926.38,295.7 929.89,299.21 986.21,299.21 997,310 997,356.42 1020.5,379.92 v1(1027.56,379.92) 1074.41,379.92 C122.2 1062.65,395.62 1062.65,471.65 1023.33,510.97 982.4,510.97 980.39,508.96 940.11,508.96 931.69,500.54 R111.1
  BOT w6: J13.7 1021.65,374.02 v1(1027.56,379.92)
SIPM_VCC_EXT: J11.7 R111.2 | length 823.4
  TOP w10: v1(851.38,499.75) R111.2
  BOT w10: J11.7 267.04,464.96 226,506 226,531 255.04,560.04 388.96,560.04 448.24,500.76 555.24,500.76 584.72,471.28 691.72,471.28 723.27,502.84 848.29,502.84 v1(851.38,499.75)
TEMP_EXT: J11.8 J13.2 | length 682.5
  BOT w10: J11.8 485.32,464.96 495,455.28 698.34,455.28 730.9,487.84 820.22,487.84 834.46,473.6 920,473.6 921.16,472.44 J13.2
pads on no net: B3.1 B4.1 IC6.9 J13.MECH
copper on no net:
  other v1: 660.63,567.56 642.75,588.37 673.75,588.37 660.63,606.93

## Polygon pours and split planes (outlines as drawn)
GND on G1 (split plane): 2420.85,20.1 138.21,20.1 138.21,767.3 2420.85,767.3
P5V0 on PWR (split plane): 2420.85,20.1 138.21,20.1 138.21,767.3 2420.85,767.3

## Other copper
BOT:
  rectangle: 586.85,556.89 758.66,621.29

## Silkscreen, mask and mechanical layers (free items; w line width, h text height)
TopOverlay:
  text "MCORD AFE SEC v1.2" at 1176,325 h30
BottomOverlay:
  text "MCORD AFE SEC v1.2" at 1459,711 h30
BottomSolder:
  rectangle: 645.87,556 674.41,616.54
Mechanical1:
  the board outline again, w10